# Altium PCB J65ACIA.PcbDoc
Units mil, origin at the board's own origin, x right, y up, seen from the top; angles counter-clockwise.
Board outline 1750.81 x 3625.8 mil, 2 copper layers (Top Layer, Bottom Layer); 9 components, 24 nets, 98 pads, 417 vias.
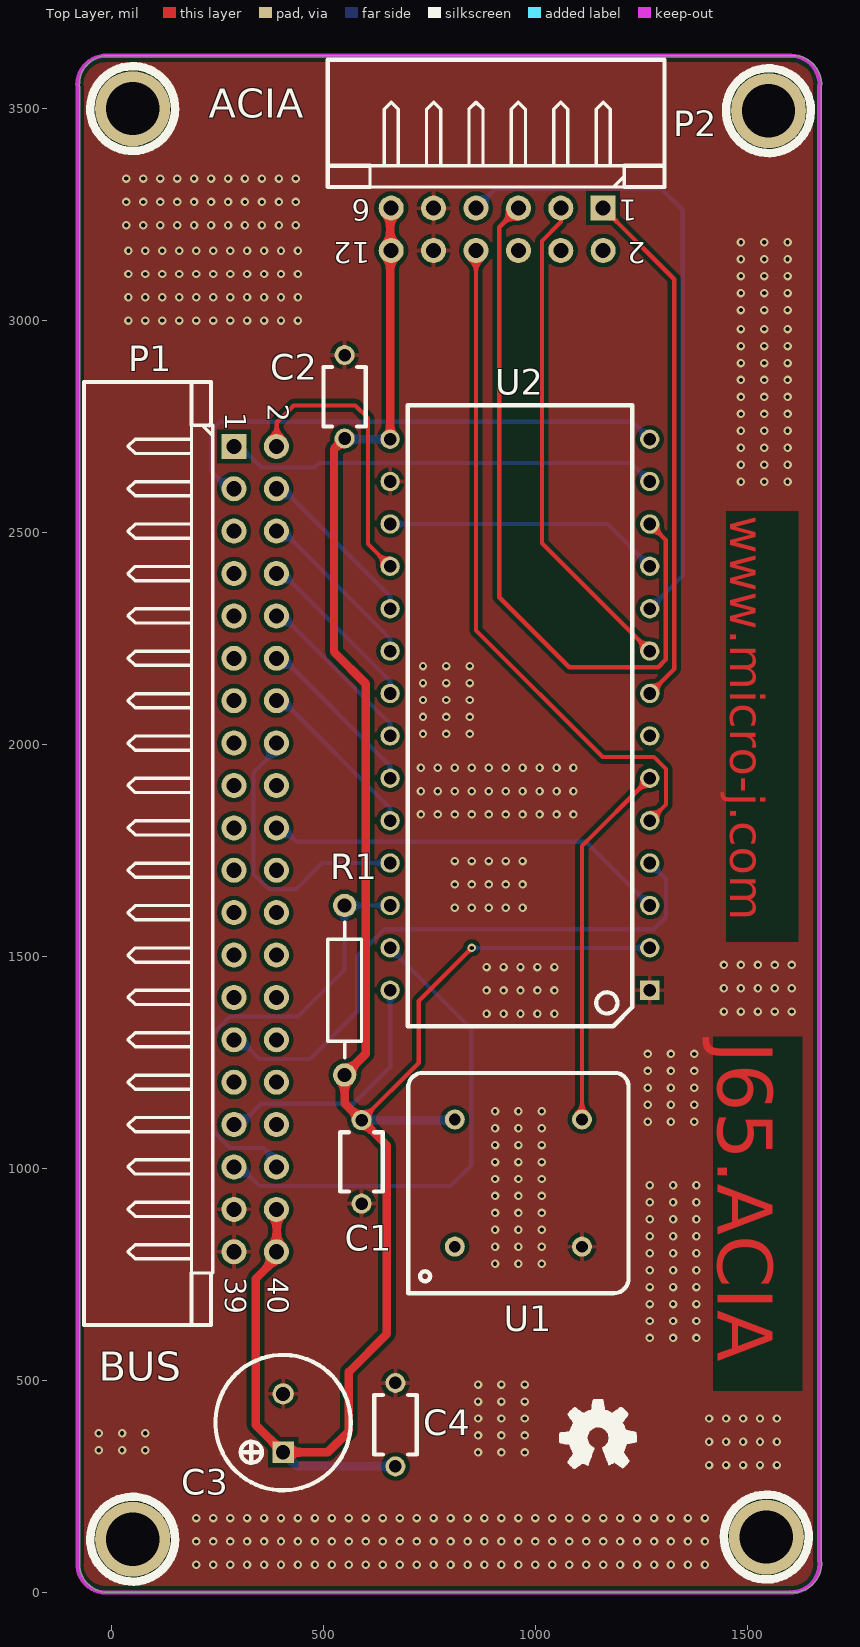
[diagram p0: Top Layer view]
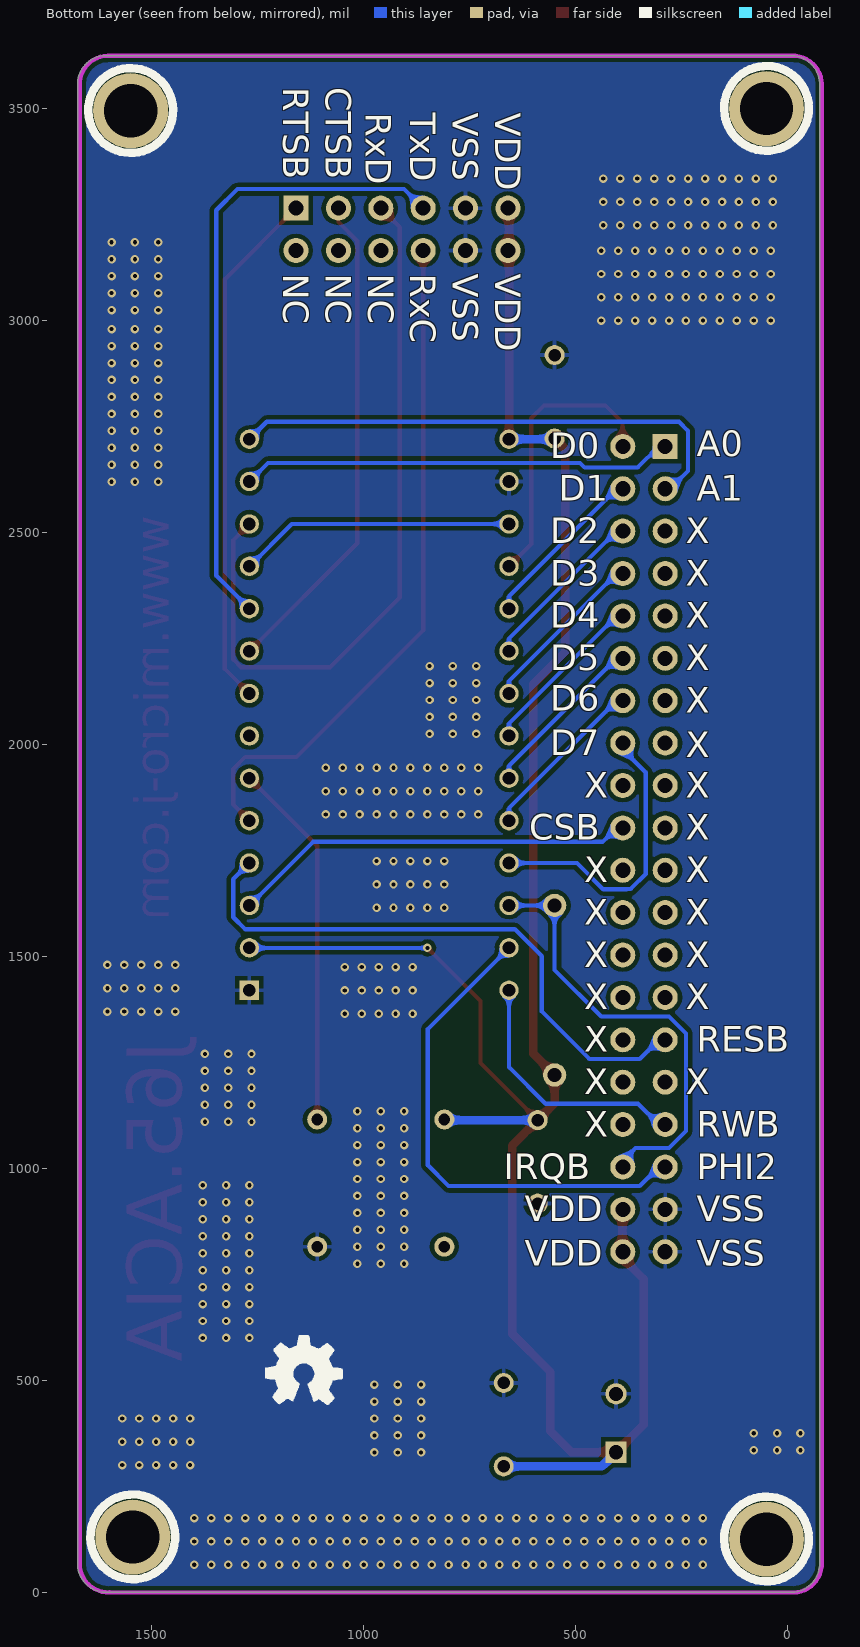
[diagram p1: Bottom Layer view, seen from below]

## Layer stack, top to bottom
Top Solder: solder mask 0.4, Solder Resist, Dk 3.5
Top Layer: signal copper 1.4
Dielectric 1: dielectric 12.6, FR-4, Dk 4.8
Bottom Layer: signal copper 1.4
Bottom Solder: solder mask 0.4, Solder Resist, Dk 3.5

## Board outline
-75,70.37 -75,3550 cw(c-7.5,3557.5) -4.98,3625.37 -4.99,3625 1600.02,3625.37 1600,3625 cw(c1607.5,3557.5) 1675.37,3554.99 1675,3554.99 1675,75.37 1675.01,75.37 cw(c1607.51,67.87) 1605,0 1605.02,0.37 0,-0.05 0,0 cw(c-7.5,67.5)

## Design rules (kind name [scope] priority, off if disabled: settings)
Clearance [All] p1: gap=10 ignorepadtopadclearanceinfootprint=FALSE except(0: Arc-Hole Track-Hole SMDPad-Hole THPad-Hole Via-Hole Fill-Hole Poly-Hole Region-Hole Text-Hole)
PolygonConnect [All] p1: connectstyle=Relief reliefconductorwidth=10 reliefentries=4 polygonreliefangle="90 Angle" airgapwidth=10
RoutingVias [All] p1: holewidth=10 width=20 viastyle="Through Hole" minholewidth=10 minwidth=20 maxholewidth=12 maxwidth=24
SolderMaskExpansion [All] p1: expansion=4
Width [All] p1: maxlimit=50 minlimit=10 preferedwidth=10 minimp=50.000000 maximp=50.000000 favimp=50.000000
30 further rules are at their usual default settings.

## Components (designator, comment, footprint, x,y, rotation, side; value= is the part's Value field where it differs from the comment)
C1 "0.1uF" CAP508 590.02,1015.37 r270 top
C2 "0.1uF" CAP508 550.02,2820.37 r90 top
C3 "470uF" CAP8X12 405.02,330.37 r90 top
C4 "0.1uF" CAP508 670.02,395.37 r90 top
P1 "HEAD20X2" HD20X2 135,1705.37 r270 top
P2 "HEAD6X2" HD6X2 910.02,3215.37 r180 top
R1 "10K" AXIAL-0.4 550.02,1420.37 r90 top
U1 "1.8432MHz" OSC4P 810.02,815.37 r0 top
U2 "R65C51" DIP28V 963.76,2070.37 r180 top

## Footprints (in the part's own frame and the unit in brackets; to place one, negate y for a bottom-side part, rotate by r counter-clockwise, add the part's x,y. Pads: shape width x height; smd on the part's side, far side on the other; paste and mask are expansions set on the pad)
AXIAL-0.4 [mm]
  round 1.4 hole 0.85: 1(-5.08,0) 2(5.08,0)
  silkscreen extent -4.06,-1.02 4.06,1.02
CAP8X12 [mm]
  rect 1.275x1.275 hole 0.85: 1(0,0)
  round 1.275 hole 0.85: 2(3.5,0)
  silkscreen extent -2.28,-4.06 5.84,4.05
CAP508 [mm]
  round 1.2 hole 0.75: 1(-2.5,0) 2(2.5,0)
  silkscreen extent -1.78,-1.27 1.78,1.27
DIP28V [mil]
  rect 45.63x45.63 hole 29.88: 1(-306.26,650)
  round 45.63 hole 29.88: 2(-306.26,550) 3(-306.26,450) 4(-306.26,350) 5(-306.26,250) 6(-306.26,150) 7(-306.26,50) 8(-306.26,-50) 9(-306.26,-150) 10(-306.26,-250) 11(-306.26,-350) 12(-306.26,-450) 13(-306.26,-550) 14(-306.26,-650) 15(306.26,-650) 16(306.26,-550) 17(306.26,-450) 18(306.26,-350) 19(306.26,-250) 20(306.26,-150) 21(306.26,-50) 22(306.26,50) 23(306.26,150) 24(306.26,250) 25(306.26,350) 26(306.26,450) 27(306.26,550) 28(306.26,650)
  silkscreen extent -265,-730 265,735
HD6X2 [mm]
  rect 1.5x1.5 hole 0.9: 1(-6.35,-1.27)
  round 1.5 hole 0.9: 2(-6.35,1.27) 3(-3.81,-1.27) 4(-3.81,1.27) 5(-1.27,-1.27) 6(-1.27,1.27) 7(1.27,-1.27) 8(1.27,1.27) 9(3.81,-1.27) 10(3.81,1.27) 11(6.35,-1.27) 12(6.35,1.27)
  silkscreen extent -10.03,-10.16 10.16,-2.54
HD20X2 [mm]
  rect 1.5x1.5 hole 0.9: 1(-25.349,3.912)
  round 1.5 hole 0.9: 2(-25.349,6.452) 3(-22.809,3.912) 4(-22.809,6.452) 5(-20.269,3.912) 6(-20.269,6.452) 7(-17.729,3.912) 8(-17.729,6.452) 9(-15.189,3.912) 10(-15.189,6.452) 11(-12.649,3.912) 12(-12.649,6.452) 13(-10.109,3.912) 14(-10.109,6.452) 15(-7.569,3.912) 16(-7.569,6.452) 17(-5.029,3.912) 18(-5.029,6.452) 19(-2.489,3.912) 20(-2.489,6.452) 21(0.051,3.912) 22(0.051,6.452) 23(2.591,3.912) 24(2.591,6.452) 25(5.131,3.912) 26(5.131,6.452) 27(7.671,3.912) 28(7.671,6.452) 29(10.211,3.912) 30(10.211,6.452) 31(12.751,3.912) 32(12.751,6.452) 33(15.291,3.912) 34(15.291,6.452) 35(17.831,3.912) 36(17.831,6.452) 37(20.371,3.912) 38(20.371,6.452) 39(22.911,3.912) 40(22.911,6.452)
  silkscreen extent -29.21,-5.08 27.3,2.64
OSC4P [mm]
  round 1.2 hole 0.7: 1(0,0) 4(7.62,0) 5(7.62,7.62) 8(0,7.62)
  silkscreen extent -2.79,-2.79 10.41,10.41

## Part data
C1 C2 C4: library part CAP1
C3: library part CAP2
R1: library part RES1
U1: library part OSCX
P1 P2: LatestRevisionDate=17-Jul-2002, LatestRevisionNote="Re-released for DXP Platform.", Publisher="Altium Limited"

## Free pads (board coordinates)
  round 177.17 hole 125.98: 0(50.02,125.37) 0(50.02,3500.37) 0(1545.02,130.37) 0(1550.02,3495.37)

## Via types
v1: diameter 20, hole 10, Top Layer to Bottom Layer, tented both sides, 417 vias

## Nets (pads, with @x,y where several pads share a name; then routed paths per layer and width w, separated by ;. In a path a pad name is that pad's centre, name@x,y a point inside that pad or via, vN(x,y) a via of type N, cw(c..) or ccw(c..) an arc to the next point about the centre after c; other vN are vias at no path point)
1M8432: U1.5 U2.6 | length 871.3
  Top Layer w10: U1.5 1110.01,1760.37 U2.6
A0: P1.1 U2.13 | length 1009.5
  Bottom Layer w10: P1.1@304.01,2703.37 354.01,2653.37 479.02,2653.37 490.02,2664.37 1226.01,2664.37 U2.13
A1: P1.3 U2.14 | length 1242.1
  Bottom Layer w10: P1.3@304.01,2603.37 P1.3 276.63,2603.37 235,2645 235,2740 256.37,2761.37 1229.01,2761.37 U2.14
CSB: P1.20 U2.3 | length 941.8
  Bottom Layer w10: P1.20@404.01,1803.37 437.01,1770.37 1120.01,1770.37 U2.3
CTSB: P2.3 U2.9 | length 1168.9
  Top Layer w10: P2.3 1060.01,3232.67 1015.49,3188.14 1015.49,2474.9 U2.9
D0: P1.2 U2.18 | length 677.8
  Top Layer w10: P1.2@404.01,2703.37 390,2717.38 390,2760 430,2800 575,2800 605.02,2769.98 605.02,2472.85 U2.18
D1: P1.4 U2.19 | length 388
  Bottom Layer w10: P1.4@404.01,2603.37 657.5,2349.89 U2.19
D2: P1.6 U2.20 | length 388
  Bottom Layer w10: P1.6@404.01,2503.37 657.5,2249.89 U2.20
D3: P1.8 U2.21 | length 388
  Bottom Layer w10: P1.8@404.01,2403.37 657.5,2149.89 U2.21
D4: P1.10 U2.22 | length 388
  Bottom Layer w10: P1.10@404.01,2303.37 657.5,2049.89 U2.22
D5: P1.12 U2.23 | length 388
  Bottom Layer w10: P1.12@404.01,2203.37 657.5,1949.89 U2.23
D6: P1.14 U2.24 | length 388
  Bottom Layer w10: P1.14@404.01,2103.37 657.5,1849.89 U2.24
D7: P1.16 U2.25 | length 700.7
  Bottom Layer w10: P1.16@404.01,2003.37 335,1934.35 335,1694.4 370.56,1658.84 379.55,1658.84 380.02,1658.37 435.02,1658.37 497.02,1720.37 U2.25
IRQB: P1.36 R1.2 U2.26 | length 1060.8
  Bottom Layer w10: P1.36@404.01,1003.37 359.01,1048.37 280.02,1048.37 240,1088.39 240,1318.35 280.02,1358.37 440.02,1358.37 550.01,1468.37 R1.2 U2.26
PHI2: P1.35 U2.27 | length 1176.3
  Bottom Layer w10: P1.35@304.01,1003.37 349.01,958.37 800.02,958.37 849.02,1007.37 849.02,1328.85 U2.27
RDY: U2.11 U2.17 | length 653.9
  Bottom Layer w10: U2.17 1170.01,2520.37 U2.11
RESB: P1.29 U2.4 | length 1380.9
  Bottom Layer w10: P1.29@304.01,1303.37 349.01,1258.37 468.02,1258.37 580.02,1370.37 580.02,1500.37 644.02,1564.37 1280.02,1564.37 1308.02,1592.37 1308.02,1682.37 U2.4
RTSB: P2.1 U2.8 | length 1238.5
  Top Layer w10: P2.1 1327.83,3097.55 1327.83,2178.19 U2.8
RWB: P1.33 U2.28 | length 591.1
  Bottom Layer w10: P1.33@304.01,1103.37 353.01,1152.37 571.02,1152.37 657.5,1238.85 U2.28
RxC: P2.8 U2.5 | length 1617.2
  Top Layer w10: P2.8 860.01,2269.37 1159.02,1970.37 1280.02,1970.37 1308.02,1942.37 1308.02,1858.37 U2.5
RxD: P2.5 U2.12 | length 1741
  Top Layer w10: P2.5 915.02,3220.37 915.02,2347.37 1080.02,2182.37 1290.02,2182.37 1307.83,2200.18 1307.83,2482.55 U2.12
TxD: P2.7 U2.10 | length 1499.7
  Bottom Layer w10: P2.7 905.01,3310.37 1298.02,3310.37 1348.02,3260.37 1348.02,2398.37 U2.10
VDD: C1.1 C2.1 C3.1 C4.1 P1.38 P1.40 P2.11 P2.12 R1.1 U1.8 U2.2 U2.15 | length 5370.1
  Top Layer w10: C1.1 725,1248.78 725,1395 v1(850,1520)
  Top Layer w20: P1.38@404.01,903.37 390,889.35 390,789.35 340,739.35 340,395.38 C3.1 510.37,330.37 560,380 560,520 650,610 650,1053.81 C1.1 550.01,1153.79 R1.1 600,1270.35 600,2143.39 525,2218.39 525,2696.93 C2.1 ; U2.15 P2.11@657.5,3265.37
  Bottom Layer w10: v1(850,1520) 1269.65,1520 U2.2
  Bottom Layer w20: C3.1 438.44,296.94 C4.1 ; C2.1@550.01,2720.37 U2.15 ; C1.1 U1.8@810.01,1113.79
VSS: C1.2 C2.2 C3.2 C4.2 P1.37 P1.39 P2.9 P2.10 U1.4 U2.1 U2.16
  other v1: 200,65 240,65 280,65 320,65 360,65 400,65 440,65 480,65 520,65 560,65 600,65 640,65 680,65 720,65 760,65 800,65 840,65 880,65 920,65 960,65 1000,65 1040,65 1080,65 1120,65 1160,65 1200,65 1240,65 1280,65 1320,65 1360,65 1400,65 200,120 240,120 280,120 320,120 360,120 400,120 440,120 480,120 520,120 560,120 600,120 640,120 680,120 720,120 760,120 800,120 840,120 880,120 920,120 960,120 1000,120 1040,120 1080,120 1120,120 1160,120 1200,120 1240,120 1280,120 1320,120 1360,120 1400,120 200,175 240,175 280,175 320,175 360,175 400,175 440,175 480,175 520,175 560,175 600,175 640,175 680,175 720,175 760,175 800,175 840,175 880,175 920,175 960,175 1000,175 1040,175 1080,175 1120,175 1160,175 1200,175 1240,175 1280,175 1320,175 1360,175 1400,175 1410,300 1450,300 1490,300 1530,300 1570,300 865,330 920,330 975,330 -30,335 25,335 80,335 1410,355 1450,355 1490,355 1530,355 1570,355 865,370 920,370 975,370 -30,375 25,375 80,375 865,410 920,410 975,410 1410,410 1450,410 1490,410 1530,410 1570,410 865,450 920,450 975,450 865,490 920,490 975,490 1270,600 1325,600 1380,600 1270,640 1325,640 1380,640 1270,680 1325,680 1380,680 1270,720 1325,720 1380,720 1270,760 1325,760 1380,760 905,775 960,775 1015,775 1270,800 1325,800 1380,800 905,815 960,815 1015,815 1270,840 1325,840 1380,840 905,855 960,855 1015,855 1270,880 1325,880 1380,880 905,895 960,895 1015,895 1270,920 1325,920 1380,920 905,935 960,935 1015,935 1270,960 1325,960 1380,960 905,975 960,975 1015,975 905,1015 960,1015 1015,1015 905,1055 960,1055 1015,1055 905,1095 960,1095 1015,1095 1265,1110 1320,1110 1375,1110 905,1135 960,1135 1015,1135 1265,1150 1320,1150 1375,1150 1265,1190 1320,1190 1375,1190 1265,1230 1320,1230 1375,1230 1265,1270 1320,1270 1375,1270 885,1365 925,1365 965,1365 1005,1365 1045,1365 1445,1370 1485,1370 1525,1370 1565,1370 1605,1370 885,1420 925,1420 965,1420 1005,1420 1045,1420 1445,1425 1485,1425 1525,1425 1565,1425 1605,1425 885,1475 925,1475 965,1475 1005,1475 1045,1475 1445,1480 1485,1480 1525,1480 1565,1480 1605,1480 810,1615 850,1615 890,1615 930,1615 970,1615 810,1670 850,1670 890,1670 930,1670 970,1670 810,1725 850,1725 890,1725 930,1725 970,1725 730,1835 770,1835 810,1835 850,1835 890,1835 930,1835 970,1835 1010,1835 1050,1835 1090,1835 730,1890 770,1890 810,1890 850,1890 890,1890 930,1890 970,1890 1010,1890 1050,1890 1090,1890 730,1945 770,1945 810,1945 850,1945 890,1945 930,1945 970,1945 1010,1945 1050,1945 1090,1945 735,2025 790,2025 845,2025 735,2065 790,2065 845,2065 735,2105 790,2105 845,2105 735,2145 790,2145 845,2145 735,2185 790,2185 845,2185 1485,2620 1540,2620 1595,2620 1485,2660 1540,2660 1595,2660 1485,2700 1540,2700 1595,2700 1485,2740 1540,2740 1595,2740 1485,2780 1540,2780 1595,2780 1485,2820 1540,2820 1595,2820 1485,2860 1540,2860 1595,2860 1485,2900 1540,2900 1595,2900 1485,2940 1540,2940 1595,2940 1485,2980 1540,2980 1595,2980 40,3000 80,3000 120,3000 160,3000 200,3000 240,3000 280,3000 320,3000 360,3000 400,3000 440,3000 1485,3025 1540,3025 1595,3025 40,3055 80,3055 120,3055 160,3055 200,3055 240,3055 280,3055 320,3055 360,3055 400,3055 440,3055 1485,3065 1540,3065 1595,3065 1485,3105 1540,3105 1595,3105 40,3110 80,3110 120,3110 160,3110 200,3110 240,3110 280,3110 320,3110 360,3110 400,3110 440,3110 1485,3145 1540,3145 1595,3145 40,3165 80,3165 120,3165 160,3165 200,3165 240,3165 280,3165 320,3165 360,3165 400,3165 440,3165 1485,3185 1540,3185 1595,3185 35,3225 75,3225 115,3225 155,3225 195,3225 235,3225 275,3225 315,3225 355,3225 395,3225 435,3225 35,3280 75,3280 115,3280 155,3280 195,3280 235,3280 275,3280 315,3280 355,3280 395,3280 435,3280 35,3335 75,3335 115,3335 155,3335 195,3335 235,3335 275,3335 315,3335 355,3335 395,3335 435,3335
pads on no net: P1.5 P1.7 P1.9 P1.11 P1.13 P1.15 P1.17 P1.18 P1.19 P1.21 P1.22 P1.23 P1.24 P1.25 P1.26 P1.27 P1.28 P1.30 P1.31 P1.32 P1.34 P2.2 P2.4 P2.6 U1.1 U2.7

## Polygon pours and split planes (outlines as drawn)
no net on Top Solder "NONET_L-01_P-001" (solid, remove dead copper): -1839.98,2335.37
VSS on Top Layer "NONET_L-01_P-001" (solid, remove dead copper, pour order 4): -275.42,3925 -265.42,3915 2029.58,3915 2029.58,-270 2009.58,-290 1964.58,-245 -305.42,-245 -305.42,3880 -270.42,3915
VSS on Bottom Layer "NONET_L-01_P-001" (solid, remove dead copper, pour order 6): -329.69,3732.74 -309.69,3752.74 2035.31,3752.74 2035.31,-417.26 1950.31,-502.26 1930.31,-482.26 -384.69,-482.26 -384.69,3657.74 -304.69,3737.74

## Keep-outs
Keep-Out Layer:
  lines w10: -80.38,69.64 ccw(c-12.52,67.13) -5.02,-0.37 ; -80.01,70 -80.01,3549.63 cw(c-12.51,3557.13) -10,3625 ; -10,3624.63 1595,3625 ; -5.02,-0.42 1600,0 ; 1594.98,3624.63 cw(c1602.48,3557.13) 1670.35,3554.62 ; 1599.98,-0.37 ccw(c1602.5,67.5) 1670,75 ; 1669.99,75 1669.99,3554.62

## Other copper
Top Layer:
  text "www.micro-j.com" at 1460,2540 h80 r270
  text "J65.ACIA" at 1430,1300 h130 r270

## Silkscreen, mask and mechanical layers (free items; w line width, h text height)
Top Overlay:
  drawing of 305 lines, arcs and shapes, not listed
  text "ACIA" at 230,3455 h118.11
  text "BUS" at -30,475 h118.11
Bottom Overlay:
  drawing of 305 lines, arcs and shapes, not listed
  text "CTSB" at 1090,3550 h60 r90
  text "RTSB" at 1190,3550 h60 r90
  text "VDD" at 690,3490.02 h60 r90
  text "VSS" at 790,3490.02 h60 r90
  text "TxD" at 890,3490.02 h60 r90
  text "RxD" at 995,3490.02 h60 r90
  text "VDD" at 690,3110.02 h60 r90
  text "VSS" at 790,3110.02 h60 r90
  text "RxC" at 890,3110.02 h60 r90
  text "NC" at 990,3110.02 h60 r90
  text "NC" at 1090,3110.02 h60 r90
  text "NC" at 1190,3110.02 h60 r90
  text "A0" at 215,2680 h60
  text "D0" at 560.02,2675 h60
  text "A1" at 215,2575 h60
  text "D1" at 540.02,2575 h60
  text "X" at 240,2475 h60
  text "D2" at 560.02,2475 h60
  text "X" at 240,2375 h60
  text "D3" at 560.02,2375 h60
  text "X" at 240,2275 h60
  text "D4" at 560.02,2275 h60
  text "X" at 240,2175 h60
  text "D5" at 560.02,2175 h60
  text "D6" at 560.02,2080 h60
  text "X" at 240,2075 h60
  text "D7" at 560.02,1975 h60
  text "X" at 240,1970 h60
  text "X" at 240,1875 h60
  text "X" at 480,1875 h60
  text "X" at 240,1775 h60
  text "CSB" at 610,1775 h60
  text "X" at 240,1675 h60
  text "X" at 480,1675 h60
  text "X" at 240,1575 h60
  text "X" at 480,1575 h60
  text "X" at 240,1475 h60
  text "X" at 480,1475 h60
  text "X" at 240,1375 h60
  text "X" at 480,1375 h60
  text "RESB" at 215,1275 h60
  text "X" at 480,1275 h60
  text "X" at 240,1175 h60
  text "X" at 480,1175 h60
  text "RWB" at 215,1075 h60
  text "X" at 480,1075 h60
  text "PHI2" at 215,975 h60
  text "IRQB" at 669.98,975 h60
  text "VSS" at 215,875 h60
  text "VDD" at 620,875 h60
  text "VSS" at 215,770 h60
  text "VDD" at 620,770 h60
Top Solder:
  region: 1615,1545 1615,2555 1460,2555 1460,1545
  region: 1420,1295 1420,480 1630,480 1630,1295
Mechanical 1:
  lines w10: -75.37,70.01 ccw(c-7.5,67.5) 0,0 ; -75,70.37 -75,3550 cw(c-7.5,3557.5) -4.98,3625.37 ; -4.99,3625 1600.02,3625.37 ; 0,-0.05 1605.02,0.37 ; 1600,3625 cw(c1607.5,3557.5) 1675.37,3554.99 ; 1605,0 ccw(c1607.51,67.87) 1675.01,75.37 1675,3554.99

## Text inside footprints (layer, text, board x,y; h text height)
P1: Top Overlay "2" at 369,2803.37 h50 r270; Top Overlay "1" at 269,2783.37 h50 r270; Top Overlay "39" at 269,743.37 h50 r270; Top Overlay "40" at 369,743.37 h50 r270
P2: Top Overlay "12" at 610.02,3185.37 h50 r180; Top Overlay "6" at 610.02,3285.37 h50 r180; Top Overlay "1" at 1240.02,3285.37 h50 r180; Top Overlay "2" at 1260.02,3185.37 h50 r180